# Altium PCB Shield_Pi_Xbee.PcbDoc
Units mil, origin at the board's own origin, x right, y up, seen from the top; angles counter-clockwise.
Board outline 1270.67 x 2528.94 mil, 2 copper layers (Top Layer, Bottom Layer); 2 components, 4 nets, 60 pads, 0 vias.
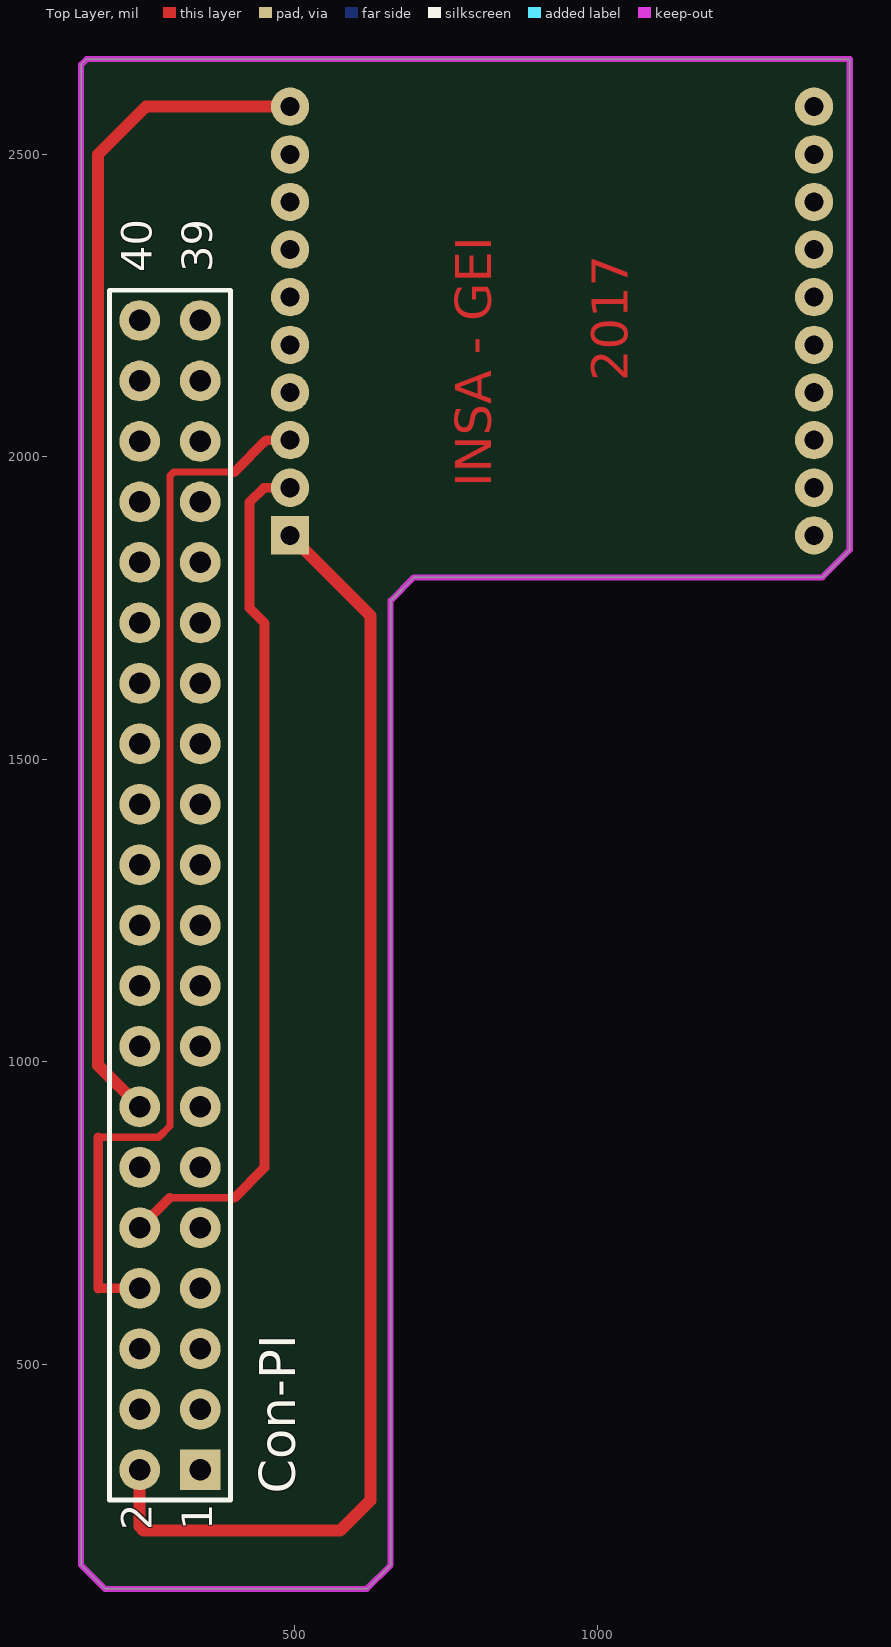
[diagram p0: Top Layer view]
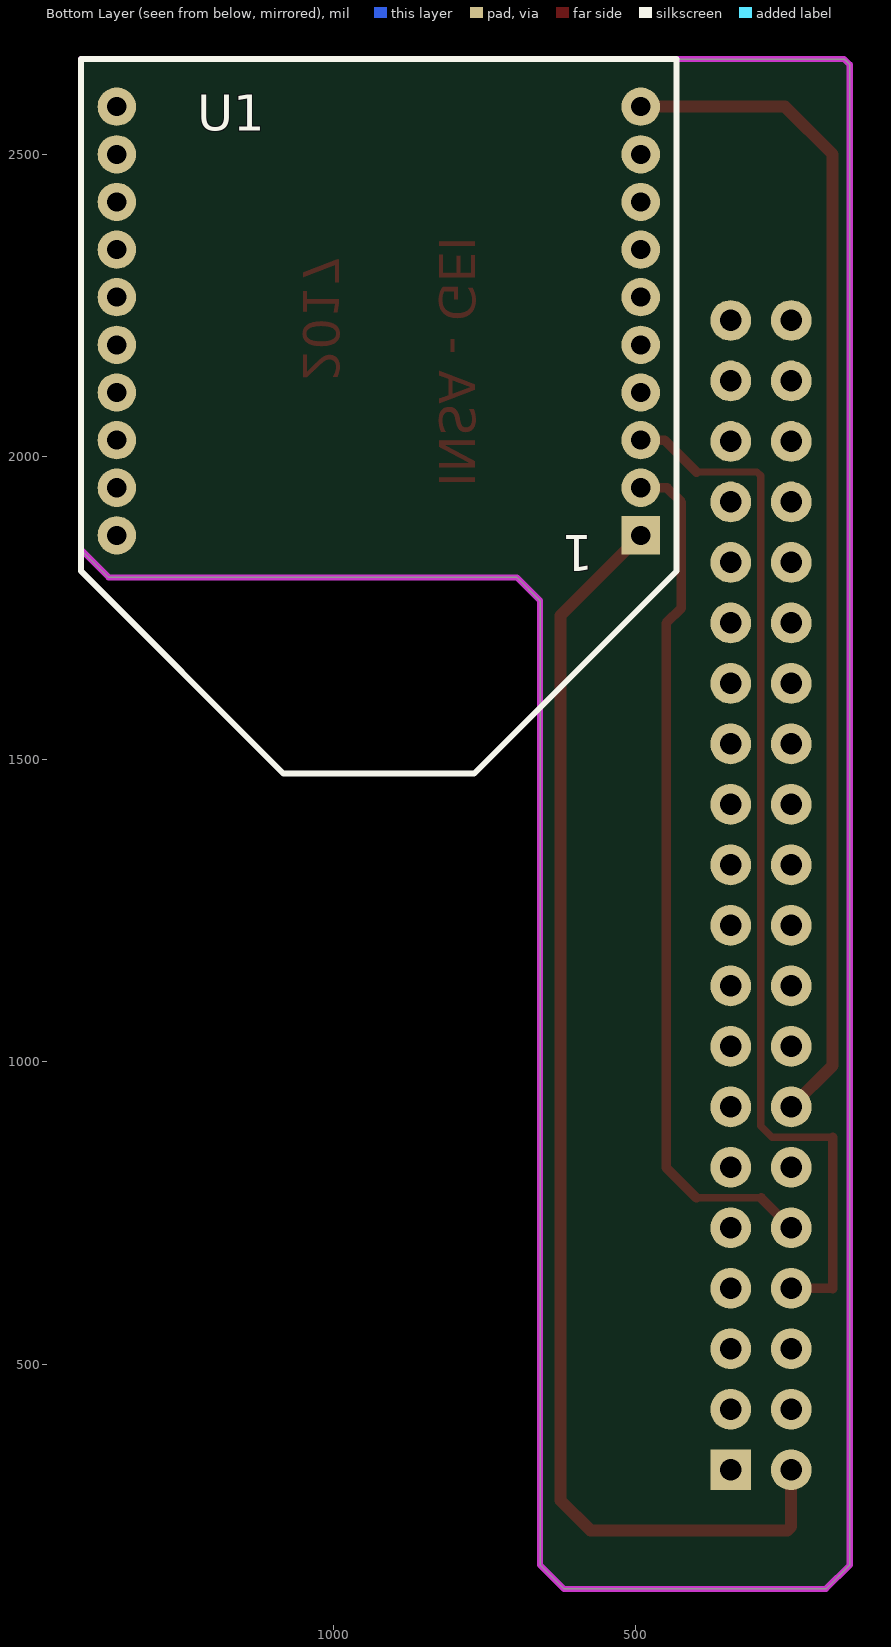
[diagram p1: Bottom Layer view, seen from below]

## Layer stack, top to bottom
Top Solder: solder mask 0.4, Solder Resist, Dk 3.5
Top Layer: signal copper 1.4
Dielectric 1: dielectric 12.6, FR-4, Dk 4.8
Bottom Layer: signal copper 1.4
Bottom Solder: solder mask 0.4, Solder Resist, Dk 3.5

## Board outline
146.65,167.91 146.65,2648.23 155.91,2657.48 1417.32,2657.48 1417.32,1846.06 1371.85,1800.59 696.85,1800.59 658.46,1762.2 658.46,167.91 619.09,128.54 186.02,128.54

## Design rules (kind name [scope] priority, off if disabled: settings)
Clearance [All] p1: gap=10
PolygonConnect [All] p1: connectstyle=Relief reliefconductorwidth=10 reliefentries=4 polygonreliefangle="90 Angle" airgapwidth=10
RoutingVias [All] p1: holewidth=28 width=50 viastyle="Through Hole" minholewidth=28 minwidth=50 maxholewidth=28 maxwidth=50
SolderMaskExpansion [All] p1: expansion=4
UnpouredPolygon [All] p1: allowunpoured=FALSE
Width [All] p1: maxlimit=25 minlimit=10 preferedwidth=16
29 further rules are at their usual default settings.

## Components (designator, comment, footprint, x,y, rotation, side; value= is the part's Value field where it differs from the comment)
Con-PI "Header 20X2" HDR2X20 343.5,325.39 r90 top
U1 "XBee" XBee 925.2,2263.78 r0 bottom locked

## Footprints (in the part's own frame and the unit in brackets; to place one, negate y for a bottom-side part, rotate by r counter-clockwise, add the part's x,y. Pads: shape width x height; smd on the part's side, far side on the other; paste and mask are expansions set on the pad)
HDR2X20 [mm] "Connector; Header; 20x2 Position"
  rect 1.71x1.71 hole 0.9: 1(0,0)
  round 1.71 hole 0.9: 2(0,2.54) 3(2.54,0) 4(2.54,2.54) 5(5.08,0) 6(5.08,2.54) 7(7.62,0) 8(7.62,2.54) 9(10.16,0) 10(10.16,2.54) 11(12.7,0) 12(12.7,2.54) 13(15.24,0) 14(15.24,2.54) 15(17.78,0) 16(17.78,2.54) 17(20.32,0) 18(20.32,2.54) 19(22.86,0) 20(22.86,2.54) 21(25.4,0) 22(25.4,2.54) 23(27.94,0) 24(27.94,2.54) 25(30.48,0) 26(30.48,2.54) 27(33.02,0) 28(33.02,2.54) 29(35.56,0) 30(35.56,2.54) 31(38.1,0) 32(38.1,2.54) 33(40.64,0) 34(40.64,2.54) 35(43.18,0) 36(43.18,2.54) 37(45.72,0) 38(45.72,2.54) 39(48.26,0) 40(48.26,2.54)
  silkscreen extent -1.27,-1.27 49.53,3.81
XBee [mm] "XBee RF transceiver from Digi"
  rect 1.61x1.61 hole 0.8: 1(-11,10)
  round 1.61 hole 0.8: 2(-11,8) 3(-11,6) 4(-11,4) 5(-11,2) 6(-11,0) 7(-11,-2) 8(-11,-4) 9(-11,-6) 10(-11,-8) 11(11,-8) 12(11,-6) 13(11,-4) 14(11,-2) 15(11,0) 16(11,2) 17(11,4) 18(11,6) 19(11,8) 20(11,10)
  silkscreen extent -12.5,-10 12.5,20

## Part data
Con-PI: "Header, 20-Pin, Dual row"
U1: "Xbee RF transceiver from Digi"

## Nets (pads, with @x,y where several pads share a name; then routed paths per layer and width w, separated by ;. In a path a pad name is that pad's centre, name@x,y a point inside that pad or via, vN(x,y) a via of type N, cw(c..) or ccw(c..) an arc to the next point about the centre after c; other vN are vias at no path point)
GND: Con-PI.14 U1.10 | length 1952.7
  Top Layer w20: Con-PI.14 175,993.9 175,2500 253.74,2578.74 U1.10
RXD0: Con-PI.10 U1.2 | length 1435.1
  Top Layer w12: 293.11,775 293.17,775.06 364.07,775.06 364.13,775 400,775
  Top Layer w16: Con-PI.10 293.11,775 ; 400,775 450,825 450,1725 425,1750 425,1925 448.82,1948.82 U1.2
TXD0: Con-PI.8 U1.3 | length 1743
  Top Layer w12: 175,625 175.39,625.39 ; 175,875 222.88,875 222.93,875.06 264.07,875.06 264.13,875 275,875 293.84,893.84 293.84,1968.84 300,1975 322.88,1975 322.93,1975.06 364.07,1975.06 364.13,1975 400,1975
  Top Layer w16: 175,625 175,875 ; 175.39,625.39 Con-PI.8 ; 400,1975 452.56,2027.56 U1.3
VCC: Con-PI.2 U1.1 | length 2148.9
  Top Layer w20: Con-PI.2 243.5,231.5 250,225 575,225 625,275 625,1737.2 U1.1
pads on no net: Con-PI.1 Con-PI.3 Con-PI.4 Con-PI.5 Con-PI.6 Con-PI.7 Con-PI.9 Con-PI.11 Con-PI.12 Con-PI.13 Con-PI.15 Con-PI.16 Con-PI.17 Con-PI.18 Con-PI.19 Con-PI.20 Con-PI.21 Con-PI.22 Con-PI.23 Con-PI.24 Con-PI.25 Con-PI.26 Con-PI.27 Con-PI.28 Con-PI.29 Con-PI.30 Con-PI.31 Con-PI.32 Con-PI.33 Con-PI.34 Con-PI.35 Con-PI.36 Con-PI.37 Con-PI.38 Con-PI.39 Con-PI.40 U1.4 U1.5 U1.6 U1.7 U1.8 U1.9 U1.11 U1.12 U1.13 U1.14 U1.15 U1.16 U1.17 U1.18 U1.19 U1.20

## Keep-outs
Keep-Out Layer:
  lines w10: 146.65,167.91 186.02,128.54 619.09,128.54 658.46,167.91 658.46,1762.2 696.85,1800.59 1371.85,1800.59 1417.32,1846.06 1417.32,2657.48 239.86,2657.48 171.56,2657.48 155.91,2657.48 146.65,2648.23 146.65,167.91 ; 146.65,167.91 146.65,167.91

## Other copper
Top Layer:
  text "2017" at 1050,2125 h60 r90
  text "INSA - GEI" at 825,1950 h60 r90

## Text inside footprints (layer, text, board x,y; h text height)
Con-PI: Top Overlay "1" at 363.5,225.39 h50 r90; Top Overlay "2" at 263.5,225.39 h50 r90; Top Overlay "40" at 263.5,2305.39 h50 r90; Top Overlay "39" at 363.5,2305.39 h50 r90
U1: Bottom Overlay "1" at 570.87,1870.08 h60 r180